# Altium PCB display-lcd-16x2.PcbDoc
Units mm, origin at the board's own origin, x right, y up, seen from the top; angles counter-clockwise.
Board outline 62.74 x 22.48 mm, 2 copper layers (Top Layer, Bottom Layer); 7 components, 16 nets, 49 pads, 0 vias.
Unrouted connection lines stored in the file: 1.
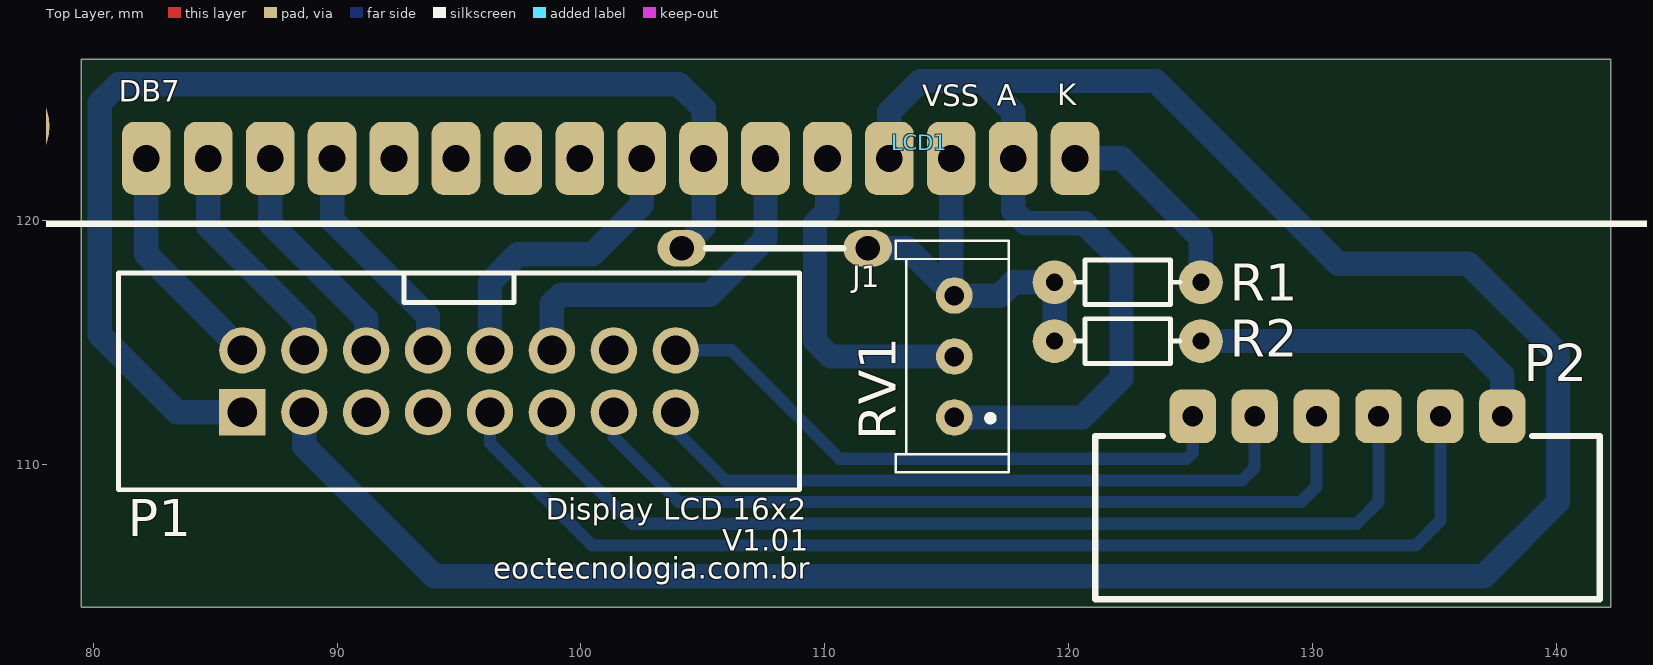
[diagram p0: Top Layer view]
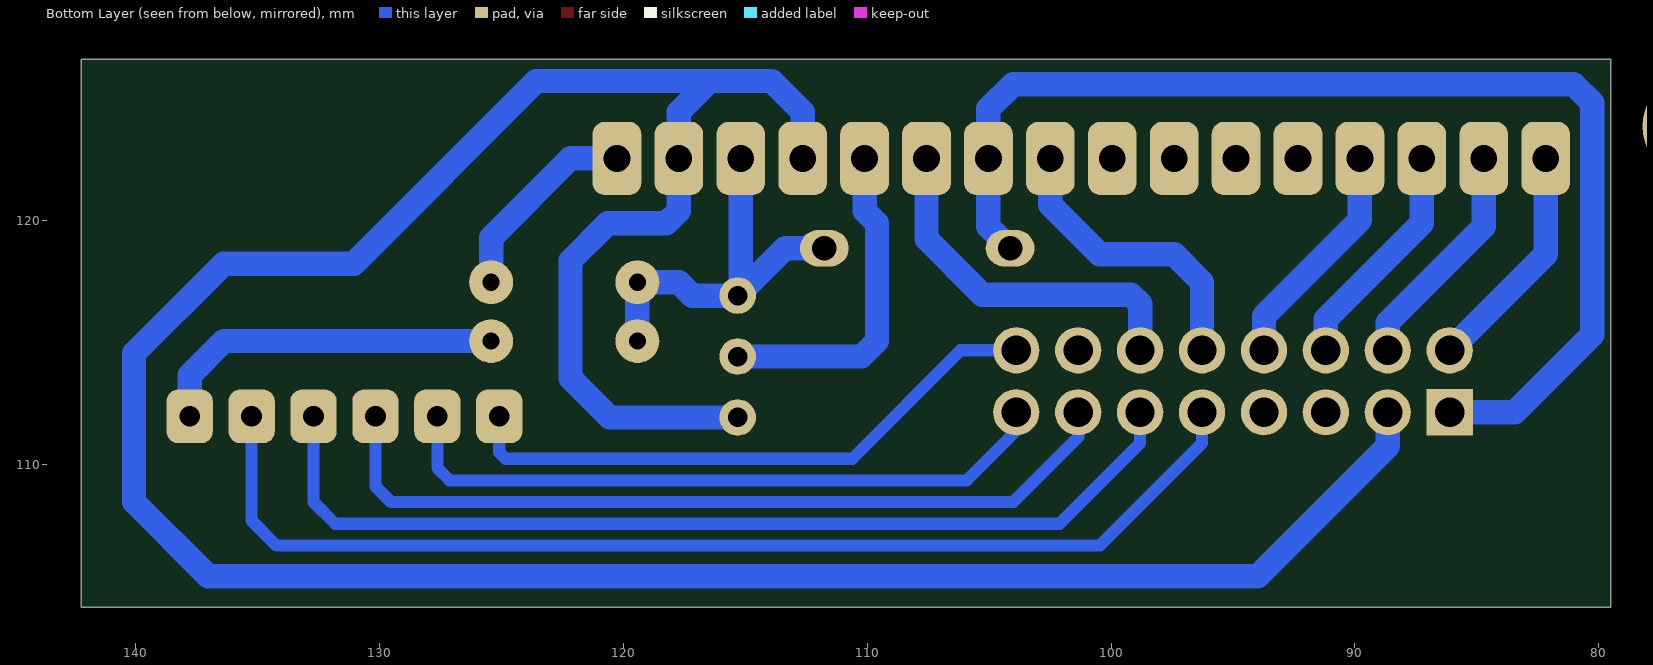
[diagram p1: Bottom Layer view, seen from below]

## Layer stack, top to bottom
Top Solder: solder mask 0.0102, Solder Resist, Dk 3.5
Top Layer: signal copper 0.0356
Dielectric 1: dielectric 0.32, FR-4, Dk 4.8
Bottom Layer: signal copper 0.0356
Bottom Solder: solder mask 0.0102, Solder Resist, Dk 3.5

## Board outline
79.502,104.14 79.502,126.619 142.24,126.619 142.24,104.14

## Design rules (kind name [scope] priority, off if disabled: settings)
Clearance [All] p1: gap=0.254 ignorepadtopadclearanceinfootprint=FALSE except(0: Arc-Hole Track-Hole SMDPad-Hole THPad-Hole Via-Hole Fill-Hole Poly-Hole Region-Hole Text-Hole)
PolygonConnect [All] p1: connectstyle=Relief reliefconductorwidth=0.254 reliefentries=4 polygonreliefangle="90 Angle" airgapwidth=0.254
RoutingVias [All] p1: holewidth=0.711 width=1.27 viastyle="Through Hole" minholewidth=0.711 minwidth=1.27 maxholewidth=0.711 maxwidth=1.27
SolderMaskExpansion [All] p1: expansion=0.102
Width [All] p1: maxlimit=3 minlimit=0.3 preferedwidth=1 minimp=50.000000 maximp=50.000000 favimp=50.000000
30 further rules are at their usual default settings.

## Components (designator, comment, footprint, x,y, rotation, side; value= is the part's Value field where it differs from the comment)
J1 "Wire Jumper" "JUMPER CR16" 107.95,118.872 r180 top
LCD1 "LCD 1602E" LCD1602B 120.269,122.555 r0 top
P1 "IDCS-14" IDCSC-16 86.106,112.141 r0 top
P2 "FN-06" FN-06 131.445,107.823 r0 top
R1 "470R 1/8W" RESISTOR_CR16 122.428,117.475 r0 top
R2 "1k 1/8W" "RES CR16" 122.428,115.062 r0 top
RV1 "10k" 3296W 115.316,114.427 r0 top

## Footprints (in the part's own frame and the unit in brackets; to place one, negate y for a bottom-side part, rotate by r counter-clockwise, add the part's x,y. Pads: shape width x height; smd on the part's side, far side on the other; paste and mask are expansions set on the pad)
3296W [mm] "TRIMPOT MULTIVOLTAS"
  round 1.5 hole 0.8: 1(0,-2.5) 2(0,0) 3(0,2.5)
  silkscreen extent -2.4,-4.75 2.22,4.75, body extent -2.45,-4.63 2.38,4.9, height 11.63
FN-06 [mm]
  rrect50% 1.9x2.2 hole 0.85: 1(-6.35,4.15) 2(-3.81,4.15) 3(-1.27,4.15) 4(1.27,4.15) 5(3.81,4.15) 6(6.35,4.15)
  silkscreen extent -10.35,-3.35 10.35,3.35, body extent -10.37,-1.71 10.33,4.99, height 4.5
IDCSC-16 [mm] "Conector IDC Macho"
  rect 1.9x1.9 hole 1.2: 1(0,0)
  round 1.9 hole 1.2: 2(0,2.54) 3(2.54,0) 4(2.54,2.54) 5(5.08,0) 6(5.08,2.54) 7(7.62,0) 8(7.62,2.54) 9(10.16,0) 10(10.16,2.54) 11(12.7,0) 12(12.7,2.54) 13(15.24,0) 14(15.24,2.54) 15(17.78,0) 16(17.78,2.54)
  silkscreen extent -5.08,-3.18 22.86,5.72, body extent -5.08,-3.17 22.86,5.72, height 9.36
"JUMPER CR16" [mm]
  oval 2x1.5 hole 1: 1(-3.81,0) 2(3.81,0)
  silkscreen extent -2.81,0 2.81,0, body extent -4.06,-0.26 4.06,0.25, height 0.55
LCD1602B [mm]
  round 5 hole 2.5: 0(-44.581,1.319) 0(31.819,1.319)
  rrect50% 2x3 hole 1.1: 1(-5.08,0) 2(-7.62,0) 3(-10.16,0) 4(-12.7,0) 5(-15.24,0) 6(-17.78,0) 7(-20.32,0) 8(-22.86,0) 9(-25.4,0) 10(-27.94,0) 11(-30.48,0) 12(-33.02,0) 13(-35.56,0) 14(-38.1,0) 15(-2.54,0) 16(0,0)
  silkscreen extent -48.58,-2.68 35.82,41.62, body extent -48.31,-2.68 35.69,41.32, height 9.6
"RES CR16" [mm]
  round 1.8 hole 0.7: 1(-3,0) 2(3,0)
  silkscreen extent -2.15,-0.91 2.15,0.91, body extent -3.2,-0.89 3.2,0.81, height 1.71
RESISTOR_CR16 [mm]
  round 1.8 hole 0.7: 1(-3,0) 2(3,0)
  silkscreen extent -2.15,-0.91 2.15,0.91, body extent -3.2,-0.89 3.2,0.81, height 1.71

## Part data
J1: library part "Jumper CR16", "JUMPER 7,62MM", Manufacturer="Stackpole Electronics Inc.", Manufacturer Part Number=JW60ZT0R00, Operating Temperature="-55°C ~ 155°C", Package / Case=-, Supplier Part Number 1=JW60ZT0R00TR-ND, Tolerance=Jumper, Category=Resistors, ComponentLink1Description=http://www.seielect.com/catalog/SEI-JW.pdf, ComponentLink1URL=http://www.seielect.com/catalog/SEI-JW.pdf, Composition="Metal Element", Código=162, Failure Rate=-, Features=-, Height - Seated (Max)=-, Montagem=PTH, Packaging="Tape & Reel (TR)", Part Status=Active, Power (Watts)=-, Pricing 1="10000=0.00396, 30000=0.00348, 50000=0.00319, 100000=0.00313 (USD)", RoHS="RoHS Compliant", Size / Dimension=-, Stock 1=560000, Supplier 1=Digi-Key, Supplier Device Package=-, Temperature Coefficient=-
LCD1: library part "LCD 1602 Azul", "LCD ALPHA/NUM DISPL 16X2 BLU/WHT", Manufacturer=AGTechonogies, Part Number="AGM 1602B-802", DataRevisao=19/05/2015, DesignBy="Rogerio Regel"
P1: library part "Header 8X2", "Header, 8-Pin, Dual row", LatestRevisionDate=17-Jul-2002, LatestRevisionNote="Re-released for DXP Platform.", Publisher="Altium Limited"
P2: library part "Conector para PCI flexível", "CONN FFC FPC TOP 6POS 2.54MM R/A", Current Rating=1A, Manufacturer="TE Connectivity AMP Connectors", Manufacturer Part Number=5-520314-6, Material Flammability Rating="UL94 V-0", Operating Temperature="-55°C ~ 105°C", Supplier Part Number 1=5-520314-6-ND, Voltage Rating=250V, Actuator Material=-, Cable End Type=Straight, Category="Connectors, Interconnects", ComponentLink1Description=http://www.te.com/commerce/DocumentDelivery/DDEController?Action=srchrtrv&DocNm=520314&DocType=Customer+Drawing&DocLang=English, ComponentLink1URL=http://www.te.com/commerce/DocumentDelivery/DDEController?Action=srchrtrv&DocNm=520314&DocType=Customer+Drawing&DocLang=English, Connector/Contact Type="Contacts, Top", Contact Finish=Tin, Contact Material="Phosphor Bronze", Features=-, FFC, FCB Thickness="0.13mm ~ 0.38mm", Flat Flex Type="FFC, FPC", Height Above Board="0.190\" (4.83mm)", Housing Material="Polyester Thermoplastic, Glass Filled", Locking Feature=-, Mounting Type="Through Hole, Right Angle", Number of Positions=6, Packaging=Bulk, Pitch="0.100\" (2.54mm)", Pricing 1="1=0.79, 25=0.7132, 100=0.61, 500=0.511, 1000=0.455, 2000=0.422 (USD)", RoHS="RoHS Compliant", Stock 1=1802, Supplier 1=Digi-Key, Termination="Kinked Pin"
R1: library part "Res 470R 1/8W 5%", "RES 470 OHM 1/8W 5% CF AXIAL CARBON FILM", Manufacturer="Stackpole Electronics Inc", Manufacturer Part Number=CF18JT470R, Operating Temperature="-55°C ~ 155°C", Package / Case=Axial, Power (Watts)="0.125W, 1/8W", Resistance (Ohms)=470, Supplier Part Number 1=CF18JT470RCT-ND, Temperature Coefficient="0/ -400ppm/°C", Tolerance=±5%, Category=Resistors, ComponentLink1Description=http://www.seielect.com/catalog/SEI-CF_CFM.pdf, ComponentLink1URL=http://www.seielect.com/catalog/SEI-CF_CFM.pdf, Composition="Carbon Film", Features="Flame Retardant Coating, Moisture Resistant, Safety", Height=-, Number of Terminations=2, Packaging="Cut Tape (CT)", Pricing 1="1=0.1, 10=0.065, 50=0.0356, 100=0.0271, 250=0.02016, 500=0.01488, 1000=0.00992, 2500=0.00837 (USD)", RoHS="RoHS Compliant", Size / Dimension="0.067\" Dia x 0.130\" L (1.70mm x 3.30mm)", Stock 1=9872, Supplier 1=Digi-Key, Supplier Device Package=Axial
R2: library part "Res 1k 1/8W 5% CR16", "RES 1k OHM 1/8W 5% AXIAL", Manufacturer="Stackpole Electronics Inc.", Manufacturer Part Number=CF18JT1K00, Operating Temperature="-55°C ~ 155°C", Package / Case=Axial, Power (Watts)="0.125W, 1/8W", Supplier Part Number 1=CF18JT1K00CT-ND, Temperature Coefficient="0/ -400ppm/°C", Tolerance=±5%, Category=Resistors, ComponentLink1Description=https://www.seielect.com/Catalog/SEI-CF_CFM.pdf, ComponentLink1URL=https://www.seielect.com/Catalog/SEI-CF_CFM.pdf, Composition="Carbon Film", Código=256, Failure Rate=-, Features="Flame Retardant Coating, Safety", Height - Seated (Max)=-, Montagem=PTH, Packaging="Cut Tape (CT)", Part Status=Active, Pricing 1="1=0.1, 10=0.049, 25=0.036, 50=0.0272, 100=0.0201, 250=0.01536, 500=0.01228, 1000=0.00904 (USD)", RoHS="RoHS Compliant", Size / Dimension="0.067\" Dia x 0.130\" L (1.70mm x 3.30mm)", Stock 1=791230, Supplier 1=Digi-Key, Supplier Device Package=Axial
RV1: library part "Trimmer 3296W-1-103LF", "Trimmer 3296W-1-103LF", Manufacturer="Bourns Inc.", Manufacturer Part Number=3386F-1-202LF, Power (Watts)="0.5W, 1/2W", Resistance (Ohms)=2k, Resistive Material=Cermet, Supplier Part Number 1=3386F-202LF-ND, Temperature Coefficient=±100ppm/°C, Tolerance=±10%, Adjustment Type="Top Adjustment", Category="Potentiometers, Variable Resistors", ComponentLink1Description=http://www.bourns.com/docs/Product-Datasheets/3386.pdf, ComponentLink1URL=http://www.bourns.com/docs/Product-Datasheets/3386.pdf, Mounting Type="Through Hole", Number of Turns=Single, Packaging=Tube, Pricing 1="1=1.6, 10=1.41, 25=1.2692, 50=1.222, 100=1.175, 250=1.10452, 500=0.94, 1000=0.8695, 2500=0.752 (USD)", RoHS="RoHS Compliant", Size / Dimension="Square - 0.375\" x 0.375\" Face x 0.190\" H (9.53mm x 9.53mm x 4.83mm)", Stock 1=6040, Supplier 1=Digi-Key, Termination Style="PC Pin"

## Nets (pads, with @x,y where several pads share a name; then routed paths per layer and width w, separated by ;. In a path a pad name is that pad's centre, name@x,y a point inside that pad or via, vN(x,y) a via of type N, cw(c..) or ccw(c..) an arc to the next point about the centre after c; other vN are vias at no path point)
5V: LCD1.2 LCD1.15 P1.3 RV1.1 | length 120.4
  Bottom Layer w1: P1.3 88.646,110.744 93.98,105.41 137.033,105.41 140.081,108.458 140.081,114.554 136.398,118.237 131.064,118.237 123.571,125.73 116.459,125.73 ; LCD1.2 112.649,124.46 113.919,125.73 116.459,125.73 ; RV1.1 120.563,111.927 122.174,113.538 122.174,118.364 120.65,119.888 118.237,119.888 117.729,120.396 LCD1.15 117.729,124.46 116.459,125.73
GND: J1.1 J1.2 LCD1.1 LCD1.5 P1.1 R1.1 R2.1 RV1.3 | length 64.9
  Bottom Layer w1: P1.1 83.439,112.141 80.264,115.316 80.264,124.841 81.026,125.603 104.013,125.603 105.029,124.587 LCD1.5 105.029,119.761 J1.2 ; J1.1 113.371,118.872 RV1.3@115.189,117.054 ; LCD1.1 RV1.3@115.189,117.054 ; R2.1 R1.1 117.729,117.475 117.181,116.927 RV1.3 RV1.3@115.189,117.054
NetLCD1_3: LCD1.3 RV1.2 | length 13.7
  Bottom Layer w1: LCD1.3 110.109,120.396 109.601,119.888 109.601,115.062 110.236,114.427 RV1.2
NetLCD1_4: LCD1.4 P1.12 | length 15.1
  Bottom Layer w1: P1.12 98.806,116.586 99.187,116.967 105.283,116.967 107.569,119.253 LCD1.4
NetLCD1_6: LCD1.6 P1.10 | length 12.2
  Bottom Layer w1: P1.10 96.266,117.475 97.409,118.618 100.457,118.618 102.489,120.65 LCD1.6
NetLCD1_11: LCD1.11 P1.8 | length 9.5
  Bottom Layer w1: LCD1.11 89.789,120.015 93.726,116.078 P1.8
NetLCD1_12: LCD1.12 P1.6 | length 9.5
  Bottom Layer w1: LCD1.12 87.249,119.888 91.186,115.951 P1.6
NetLCD1_13: LCD1.13 P1.4 | length 9.5
  Bottom Layer w1: LCD1.13 84.709,119.761 88.646,115.824 P1.4
NetLCD1_14: LCD1.14 P1.2 | length 9.5
  Bottom Layer w1: LCD1.14 82.169,118.618 P1.2
NetLCD1_16: LCD1.16 R1.2 | length 8.3
  Bottom Layer w1: LCD1.16 122.174,122.555 125.428,119.301 R1.2
NetP1_9: P1.9 P2.5 | length 46.7
  Bottom Layer w0.5: P1.9 96.266,110.871 100.457,106.68 134.239,106.68 135.255,107.696 P2.5
NetP1_11: P1.11 P2.4 | length 40.4
  Bottom Layer w0.5: P1.11 98.806,110.871 102.108,107.569 131.826,107.569 132.715,108.458 P2.4
NetP1_13: P1.13 P2.3 | length 34.1
  Bottom Layer w0.5: P1.13 101.346,111.125 104.013,108.458 129.54,108.458 130.175,109.093 P2.3
NetP1_15: P1.15 P2.2 | length 27.7
  Bottom Layer w0.5: P1.15 103.886,111.379 105.918,109.347 127.127,109.347 127.635,109.855 P2.2
NetP1_16: P1.16 P2.1 | length 24.6
  Bottom Layer w0.5: P1.16 106.172,114.681 110.617,110.236 124.841,110.236 125.095,110.49 P2.1
NetP2_6: P2.6 R2.2 | length 14.6
  Bottom Layer w1: R2.2 136.398,115.062 137.795,113.665 P2.6
pads on no net: LCD1.0 LCD1.7 LCD1.8 LCD1.9 LCD1.10 P1.5 P1.7 P1.14

## Silkscreen, mask and mechanical layers (free items; w line width, h text height)
Top Overlay:
  text "Display LCD 16x2" at 98.552,107.442 h1.5
  text "V1.01" at 105.791,106.172 h1.5
  text "eoctecnologia.com.br" at 96.393,105.029 h1.5
Mechanical 13:
  the board outline again, w0.3

## Text inside footprints (layer, text, board x,y; h text height)
LCD1: Top Overlay "A" at 117.056,124.409 h1.52; Top Overlay "K" at 119.532,124.422 h1.52; Top Overlay "VSS" at 113.995,124.396 h1.52; Top Overlay "DB7" at 81.039,124.562 h1.52